# Altium PCB PCB.PcbDoc (part 1 of 2)
Units mm, origin at the board's own origin, x right, y up, seen from the top; angles counter-clockwise.
Board outline 43.18 x 17.78 mm, 4 copper layers (TOP, GND, SIG, BOTTOM), stack 1.586 mm thick; 70 components, 66 nets, 305 pads, 129 vias.
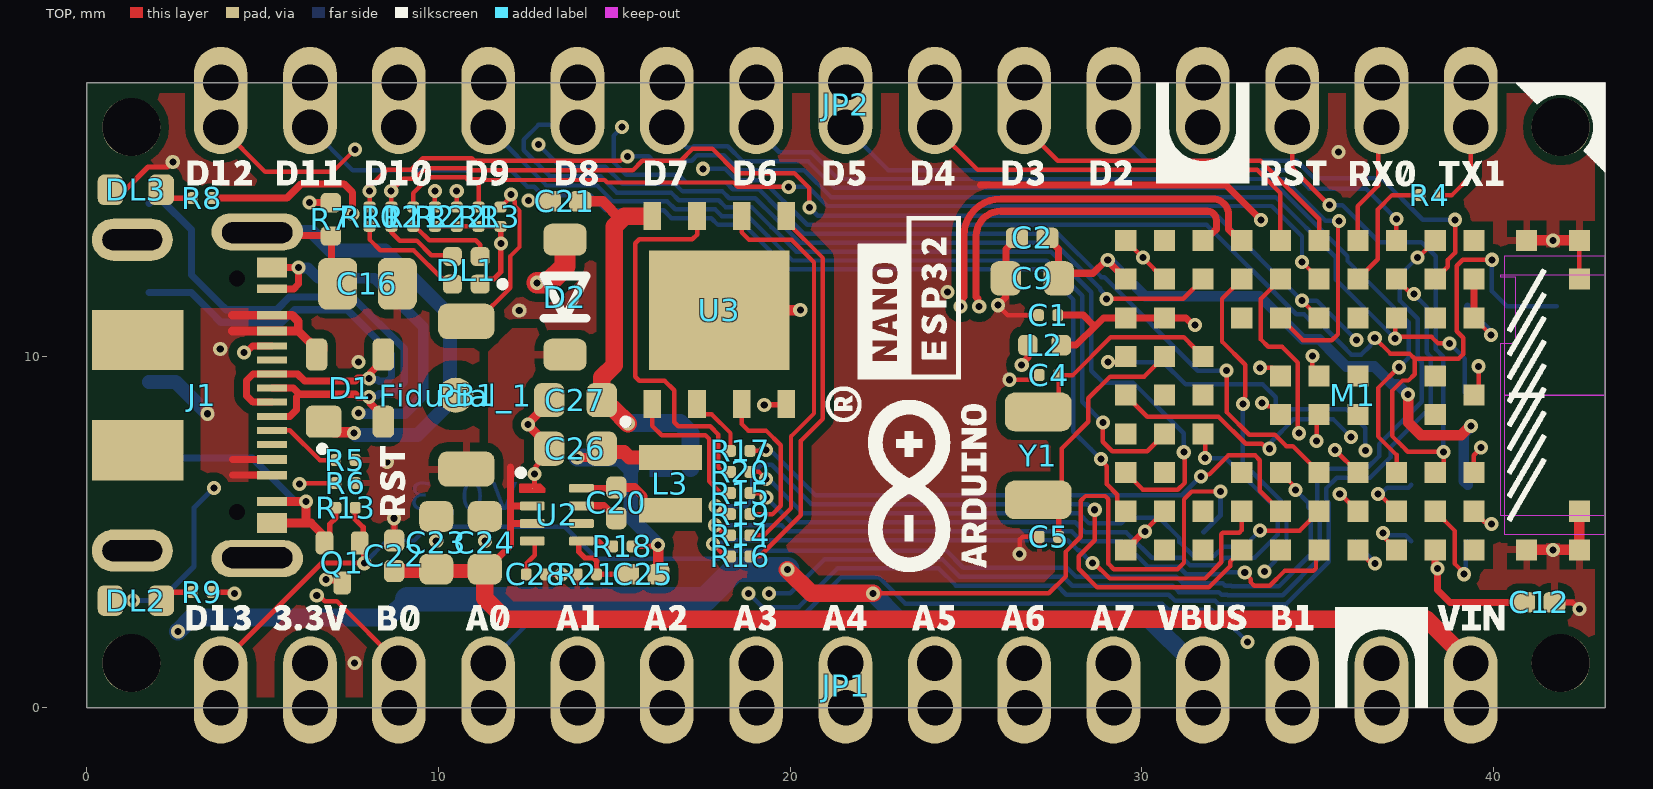
[diagram p0: TOP view]
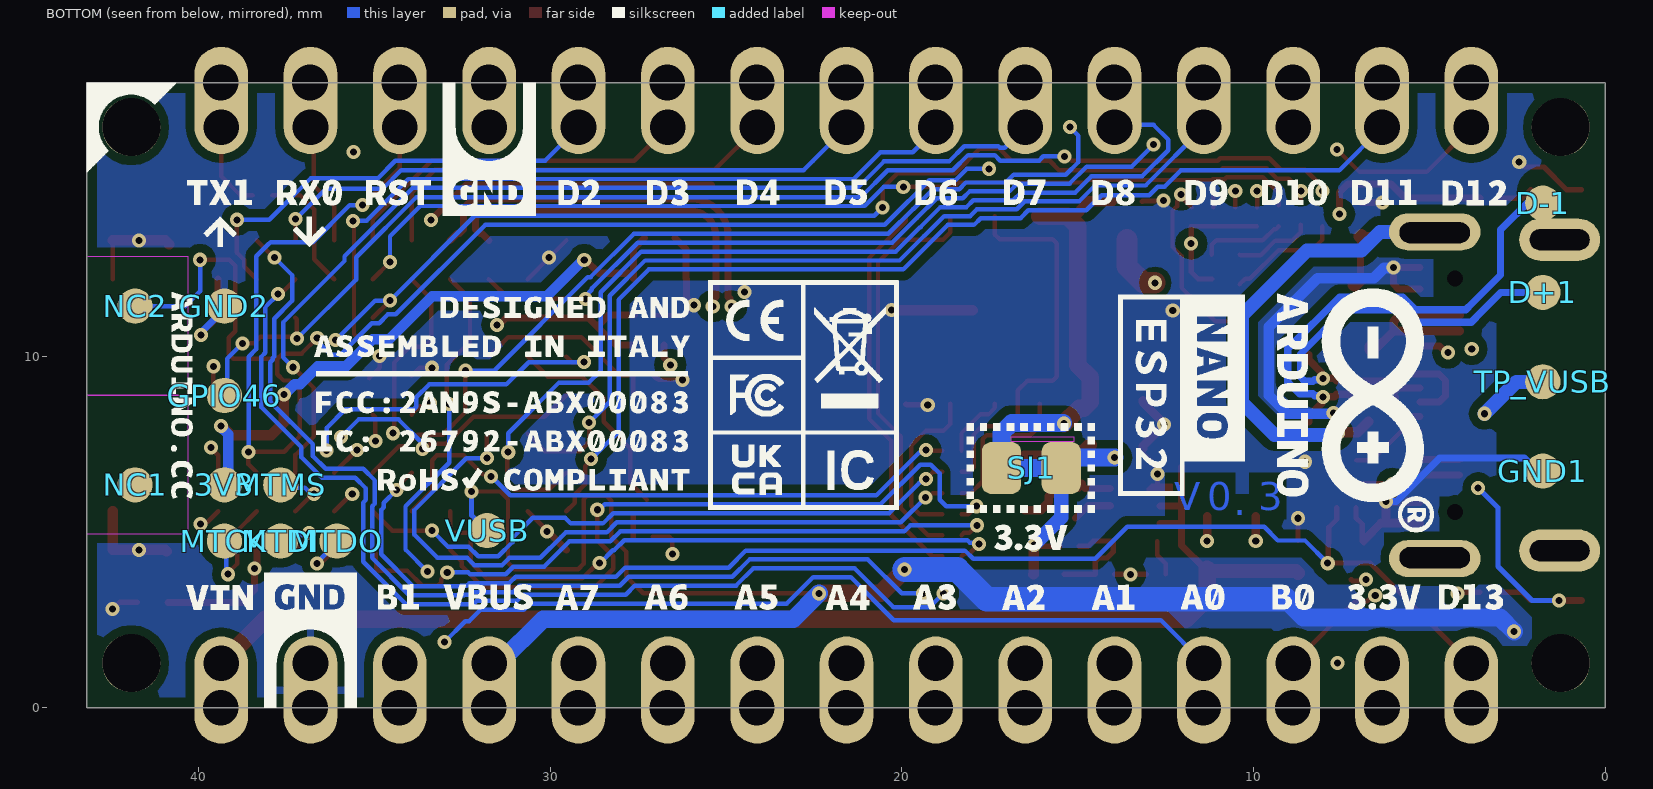
[diagram p1: BOTTOM view, seen from below]
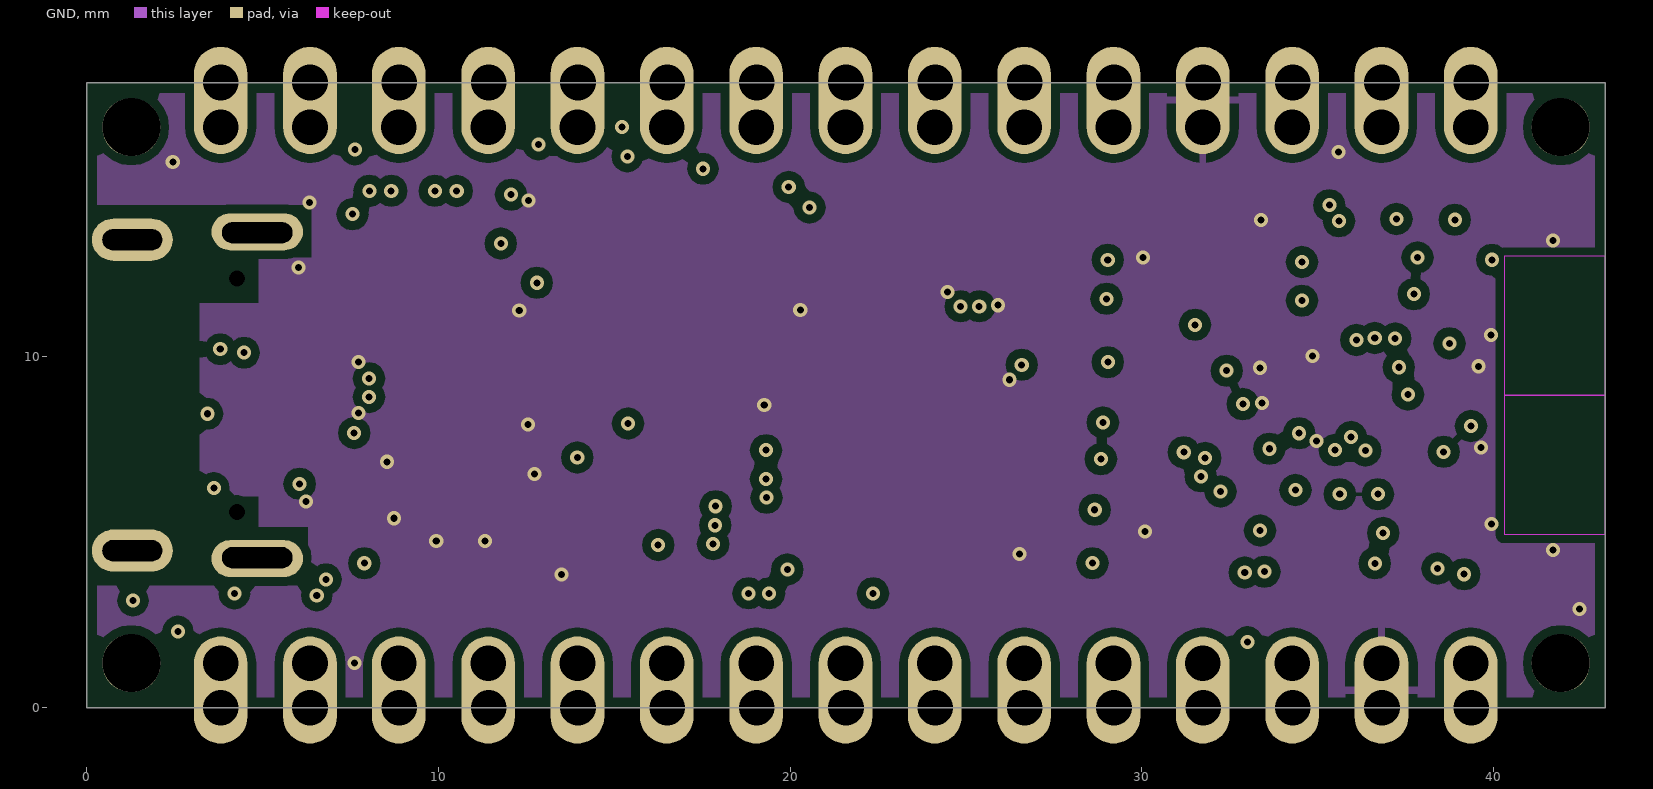
[diagram p2: GND]
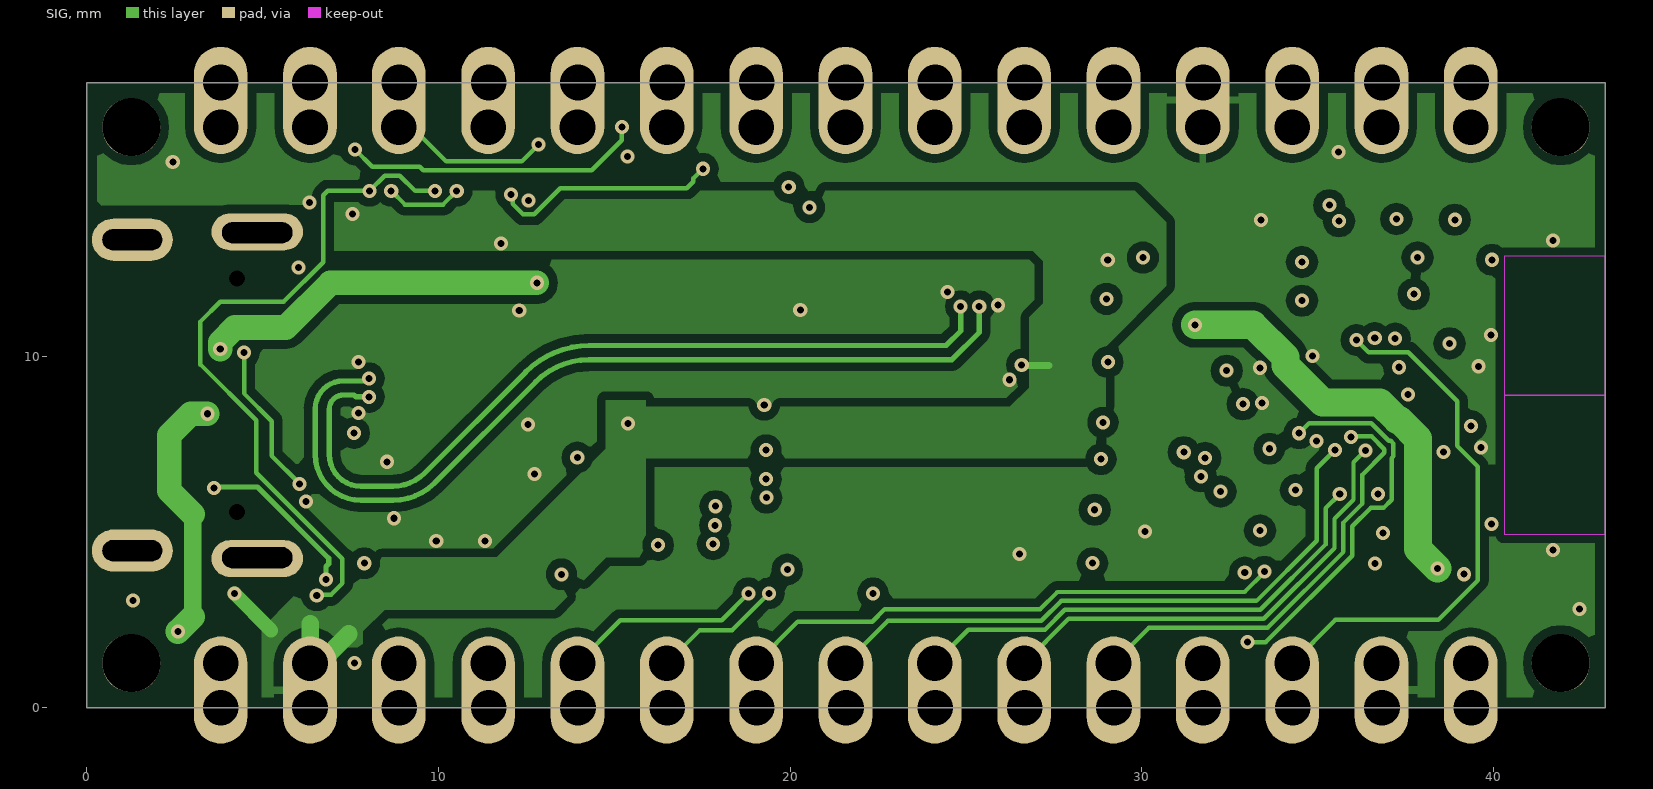
[diagram p3: SIG]
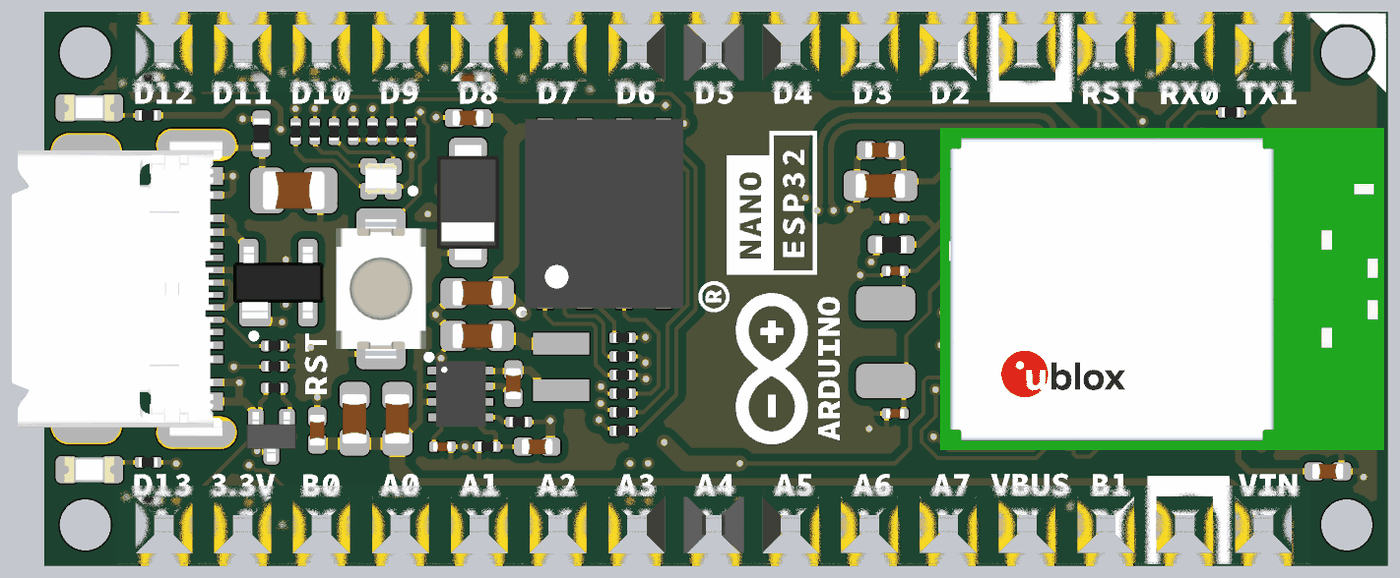
[diagram p5: 3D render of the assembled board from above, using the file's embedded part models]

## Layer stack, top to bottom
Top Solder: solder mask 0.01, Solder Resist, Dk 3.5
TOP: signal copper 0.018
Dielectric 1: prepreg 0.14, PP-014, Dk 4.2
GND: signal copper 0.035
Dielectric2: core 1.2, FR-4, Dk 4.8
SIG: signal copper 0.035
Dielectric3: prepreg 0.14, PP-014, Dk 4.2
BOTTOM: signal copper 0.018
Bottom Solder: solder mask 0.01, Solder Resist, Dk 3.5

## Board outline
0,0 43.18,0 43.18,17.78 0,17.78

## Design rules (kind name [scope] priority, off if disabled: settings)
BoardOutlineClearance BoardOutlineClearance_2 [Component = 'J1'] p1: gap=0.1 ignorepadtopadclearanceinfootprint=FALSE
BoardOutlineClearance BoardOutlineClearance_1 [(ObjectKind = 'Pad') And (Name = 'Free-2') And (PadShape_AllLayers = 'Rounded Rectangle') And (AsMM(PadXSize_AllLayers) = 1.3) And (AsMM(PadYSize_AllLayers) = 1.8)] p2: gap=0.1 ignorepadtopadclearanceinfootprint=FALSE
BoardOutlineClearance HeadersCastellated [((ObjectKind = 'Pad') And (Component = 'JP1')) OR                                                                                    ((ObjectKind = 'Pad') And (Component = 'JP2'))] p3: gap=0 ignorepadtopadclearanceinfootprint=FALSE
BoardOutlineClearance Silks [(OnLayer('Top Overlay') OR OnLayer('Bottom Overlay'))] p4: gap=0 ignorepadtopadclearanceinfootprint=FALSE
BoardOutlineClearance [All] p5: gap=0.3 ignorepadtopadclearanceinfootprint=FALSE
Clearance GND_50R [InNetClass('50R') vs InNet('GND')] p1: gap=0.127 ignorepadtopadclearanceinfootprint=FALSE
Clearance COPPER_0.25mm [All] p2: gap=0.127 ignorepadtopadclearanceinfootprint=FALSE except(0.25: Arc-Fill Arc-Poly Arc-Region Track-Fill Track-Poly Track-Region SMDPad-Fill SMDPad-Poly SMDPad-Region THPad-Fill THPad-Poly THPad-Region Via-Fill Via-Poly Via-Region Fill-Fill Fill-Poly Fill-Region Poly-Poly Poly-Region Region-Region)
Clearance "Generic clearance 0.127mm" [All] p3: gap=0.127 ignorepadtopadclearanceinfootprint=TRUE
ComponentClearance TP2 [((Name = 'MTDI') OR (Name = 'MTDO') OR (Name = 'MTCK') OR (Name = 'MTMS'))] p1: gap=-2 collisioncheckmode=3 verticalgap=0 showdistances=FALSE
ComponentClearance TP [HasFootprint('TP-1.00MM') vs HasFootprint('TP-1.00MM')] p2: gap=0.2 collisioncheckmode=3 verticalgap=-10 showdistances=FALSE
ComponentClearance UFL_ANTENNA [InComponent('ANT1') vs HasFootprint('U.FL-R-SMT-1(60)-1')] p3: gap=-20 collisioncheckmode=3 verticalgap=-20 showdistances=FALSE
ComponentClearance Headers [((Footprint = 'PINHD-1X14_5VF') OR (Footprint = 'PINHD-1X14_5VF') OR (Footprint = 'LEDC1608X80N-AK') OR (Footprint = 'CX90B-16P-Footprint-1') ) vs ((Footprint = 'PINHD-1X14_5VF') OR (Footprint = 'PINHD-1X14_5VF') OR (Footprint = 'LEDC1608X80N-AK') OR (Footprint = 'CX90B-16P-Footprint-1'))] p4: gap=-20 collisioncheckmode=3 verticalgap=-20 showdistances=FALSE
ComponentClearance RFshield [HasFootprint('Shield RF 10mm x 15mm x 3mm-Footprint-1')] p5: gap=-50 collisioncheckmode=3 verticalgap=-20 showdistances=FALSE
ComponentClearance fiducials [InComponent('Fiducial_1') vs InComponent('PB1')] p6: gap=-20 collisioncheckmode=3 verticalgap=-20 showdistances=FALSE
ComponentClearance [All] p7: gap=0.2 collisioncheckmode=3 verticalgap=0 showdistances=TRUE
DiffPairsRouting USB [InDifferentialPairClass('USB')] p1: maxlimit=0.25 minlimit=0.15 mostfreqgap=0.25 toplayer_maxgap=0.15 toplayer_prefgap=0.15 toplayer_minwidth=0.2 toplayer_maxwidth=0.21 toplayer_prefwidth=0.21 midlayer2_mingap=0.25 midlayer2_minwidth=0.15 midlayer2_maxwidth=0.15 midlayer2_prefwidth=0.15 bottomlayer_maxgap=0.15 bottomlayer_prefgap=0.15 bottomlayer_minwidth=0.21 bottomlayer_maxwidth=0.21 bottomlayer_prefwidth=0.21 impedanceprofiledriven=TRUE impedanceprofileid={0EDCC732-50F3-4DDA-8B94-FDD99B063592} impedanceprofilevalue=90.000000 maxuncoupledlength=12.7
Height [All] p1: minheight=0 maxheight=30 prefheight=12.7
HoleSize [All] p1: absolutevalues=TRUE maxlimit=30 minlimit=0.2 maxpercent=80.000 minpercent=20.000
HoleToHoleClearance [All] p1: gap=0.25 allowstackedmicrovias=FALSE
PlaneConnect [All] p1: pad.planeconnectstyle=Relief pad.reliefexpansion=0.508 pad.reliefentries=4 pad.reliefconductorwidth=0.15 pad.reliefairgap=0.254 via.planeconnectstyle=Direct via.reliefexpansion=0.508 via.reliefentries=4 via.reliefconductorwidth=0.254 via.reliefairgap=0.254
PolygonConnect 0201 [HasFootprint('RES-0201') OR HasFootprint('CAP-0201')] p1: connectstyle=Relief reliefconductorwidth=0.15 reliefentries=4 polygonreliefangle="90 Angle" airgapwidth=0.254
PolygonConnect [All] p2: thpad.connectstyle=Relief thpad.reliefconductorwidth=0.2 thpad.reliefentries=4 thpad.polygonreliefangle="90 Angle" thpad.airgapwidth=0.254 smdpad.connectstyle=Relief smdpad.reliefconductorwidth=0.2 smdpad.reliefentries=4 smdpad.polygonreliefangle="90 Angle" smdpad.airgapwidth=0.254 via.connectstyle=Direct via.reliefconductorwidth=0.254 via.reliefentries=4 via.polygonreliefangle="90 Angle" via.airgapwidth=0.254
RoomDefinition TOP [InComponentClass('TOP')] p1: confinementstyle=ConfineIn formatcopy=TRUE lockcomponents=FALSE outline 44.6,2.6 48.6,2.6 48.6,5.6 44.6,5.6
RoutingVias StandardVias [All] p1: holewidth=0.2 width=0.4 viastyle="Through Hole" minholewidth=0.2 minwidth=0.4 maxholewidth=0.2 maxwidth=0.4
ShortCircuit [Component = 'SJ1' vs (InNet('+3V3') OR InNet('NetC25_2'))] p1: allowed=TRUE
SilkToSilkClearance [All] p1: silktosilkclearance=0.2
SilkToSolderMaskClearance [IsPad] p1: minsilkscreentomaskgap=0.15 clearancetoexposedcopper=TRUE
SolderMaskExpansion VIAtented [IsVia] p1: expansion=0.102 istentingtop=TRUE
SolderMaskExpansion [All] p2: expansion=0.05 istentingtop=FALSE
UnConnectedPin [All] p1:
UnRoutedNet [All] p1: checkbadconnections=TRUE
ViasUnderSMD Flash [(ObjectKind = 'Pad') And (Name = 'U2-9')] p1: allowed=TRUE
ViasUnderSMD uC [(ObjectKind = 'Pad') And (Name = 'U4-49')] p2: allowed=TRUE
ViasUnderSMD [All] p3: allowed=FALSE
Width 50R [InNetClass('50R')] p1: maxlimit=0.254 minlimit=0.2 preferedwidth=0.254 toplayer_maxwidth=0.215 toplayer_prefwidth=0.215 impedanceprofiledriven=TRUE impedanceprofileid={0726661E-E8FD-48BE-B853-6BE56F4BAC3B} impedanceprofilevalue=50.000000 minimp=50.000000 maximp=50.000000 favimp=50.000000
Width StandardTraces [All] p2: maxlimit=5 minlimit=0.127 preferedwidth=0.15
20 further rules are at their usual default settings.

## Classes and differential pairs
net class DIGITAL: GPIO5_1 GPIO6_1 GPIO7_1 GPIO8_1 GPIO9_1 GPIO10_1 GPIO17_1 GPIO18_1 GPIO21_1 GPIO38_1 GPIO47_1 GPIO48_1
net class ANALOG: GPIO1_1 GPIO2_1 GPIO3_1 GPIO4_1 GPIO11_1 GPIO12_1 GPIO13_1 GPIO14_1
net class FLASH: GPIO27_1 GPIO28_1 GPIO29_1 GPIO30_1 GPIO31_1 GPIO32_1
differential pair class USB: USB_D_1
differential pair USB_D_1: +USB_D_1_P -USB_D_1_N

## Components (designator, comment, footprint, x,y, rotation, side; value= is the part's Value field where it differs from the comment)
3V3 "CMP-018-0005-A.3" TP-1.00MM#1 39.263,6.341 r270 bottom
C1 "GRM033R60J105MEA2D" CAP-0201 27.335,11.164 r0 top value=1µF
C2 "GRM155R61H104KE19D" CAP-0402 26.885,13.364 r0 top value=100nF
C4 "GRM0335C1E120JA01J" CAP-0201 27.36,9.464 r180 top value=12pF
C5 "GRM0335C1E120JA01J" CAP-0201 27.36,4.864 r180 top value=12pF
C9 "GRM188R61E106MA73J" CAP-0603 26.885,12.214 r0 top value=10µF
C12 "GRM155R61H104KE19D" CAP-0402 41.3,3 r180 top value=100nF
C16 "C0805C472KDRACTU" CAP-0805 7.983,12.06 r180 top value=4.7nF
C20 "GRM155R61H104KE19D" CAP-0402 15.059,5.828 r270 top value=100nF
C21 "GRM155R61H104KE19D" CAP-0402 13.6,14.4 r0 top value=100nF
C22 "GRM155R61H104KE19D" CAP-0402 8.741,4.323 r90 top value=100nF
C23 "GRM188R61E106MA73J" CAP-0603 9.94,4.692 r270 top value=10µF
C24 "GRM188R61E106MA73J" CAP-0603 11.32,4.692 r270 top value=10µF
C25 "C0402C220J5GAC7411" CAP-0402 15.825,3.797 r0 top value=22pF
C26 "GRM188R61E106MA73J" CAP-0603 13.898,7.368 r0 top value=10µF
C27 "GRM188R61E106MA73J" CAP-0603 13.898,8.748 r0 top value=10µF
C28 "GRM033R60J105MEA2D" CAP-0201 12.775,3.797 r180 top value=1µF
D1 "PRTR5V0U2X,215" SOT190P230X110-4N 7.488,9.09 r0 top
D2 "PMEG6020AELRX" SOD123-1 13.6,11.675 r90 top
D+1 "CMP-018-0005-A.3" TP-1.00MM#2 1.778,11.811 r180 bottom
D-1 "CMP-018-0005-A.3" TP-1.00MM#2 1.778,14.351 r180 bottom
DL1 "SMLP34RGB2W3" SMLP34RGB2W 10.794,12.44 r90 top
DL2 "KPT-1608YC" LEDC1608X80N-AK#1 1.4,3.05 r0 top
DL3 "HSMG-C190" LEDC1608X80N-AK#2 1.4,14.73 r0 top
Fiducial_1 "Fiducial mark 1mm with 2mm solder" "Fiducial mark 1mm with circle-Footprint-1" 10.494,8.89 r90 top
GND1 "CMP-018-0005-A.3" TP-1.00MM#2 1.778,6.731 r90 bottom
GND2 "CMP-018-0005-A.3" TP-1.00MM#1 39.263,11.421 r270 bottom
GPIO46 "CMP-018-0005-A.3" TP-1.00MM#1 39.263,8.881 r90 bottom
J1 "CX90B-16P" CX90B-16P-Footprint-1 3.288,8.89 r270 top locked
JP1 "PINHD-1X15-NANO-ANALOG-CASTELLATED" PINHD-1X14_5VF#1 3.81,1.27 r180 top locked
JP2 "PINHD-1X15-NANO-DIGITAL-CASTELLATED" PINHD-1X14_5VF#2 39.37,16.51 r0 top locked
L2 "BSCH001005052N0SCP" L-0402 27.235,10.314 r0 top
L3 "MAKK2016T3R3M" MAKK2016T3R3M-Footprint-1 16.598,6.368 r90 top value=3.3µH
M1 "NORA-W106-10B" NORA-W106-Footprint-1 35.043,8.89 r270 top locked
MTCK "CMP-018-0005-A.3" TP-1.00MM#2 39.263,4.741 r0 bottom
MTDI "CMP-018-0005-A.3" TP-1.00MM#2 37.663,4.741 r0 bottom
MTDO "CMP-018-0005-A.3" TP-1.00MM#2 36.063,4.741 r0 bottom
MTMS "CMP-018-0005-A.3" TP-1.00MM#2 37.663,6.341 r0 bottom
NC1 "CMP-018-0005-A.3" TP-1.00MM#1 41.803,6.341 r270 bottom
NC2 "CMP-018-0005-A.3" TP-1.00MM#1 41.803,11.421 r270 bottom
PB1 "IT-1185AP1C-160G-GTR" C&K_PTS820_NO_HOLES-1 10.794,8.89 r90 top locked
Q1 "2N7002T-7-F" SOT523 7.262,4.12 r180 top
R1 "RMCF0201FT976K" RES-0201 11.144,13.965 r270 top value=976k
R2 "RMCF0201FT976K" RES-0201 9.904,13.965 r270 top value=976k
R3 "RC0201FR-075K1L" RES-0201 11.764,13.965 r270 top value=5.1k
R4 "CRCW0201499RFKED" RES-0201 38.181,14.58 r180 top value=499
R5 "RC0201FR-075K1L" RES-0201 7.358,7.045 r180 top value=5.1k
R6 "RC0201FR-075K1L" RES-0201 7.362,6.39 r180 top value=5.1k
R7 "CRCW04021M00FKED" RES-0402 6.943,13.89 r270 top value=1M
R8 "CRCW0201499RFKED" RES-0201 3.29,14.49 r0 top value=499
R9 "CRCW0201499RFKED" RES-0201 3.291,3.29 r0 top value=499
R10 "CRCW0201499RFKED" RES-0201 8.044,13.965 r270 top value=499
R11 "CRCW0201499RFKED" RES-0201 9.284,13.965 r270 top value=499
R12 "CRCW0201499RFKED" RES-0201 8.664,13.965 r270 top value=499
R13 "RMCF0201FT976K" RES-0201 7.362,5.69 r0 top value=976k
R14 "CRCW02010000Z0ED" RES-0201 18.582,4.907 r0 top value=0
R15 "CRCW02010000Z0ED" RES-0201 18.582,6.107 r180 top value=0
R16 "CRCW02010000Z0ED" RES-0201 18.582,4.307 r0 top value=0
R17 "CRCW02010000Z0ED" RES-0201 18.582,7.307 r180 top value=0
R18 "RMCF0201FT976K" RES-0201 15.234,4.593 r0 top value=976k
R19 "CRCW02010000Z0ED" RES-0201 18.582,5.507 r0 top value=0
R20 "CRCW02010000Z0ED" RES-0201 18.582,6.707 r180 top value=0
R21 "AC0201FR-07220KL" RES-0201 14.225,3.797 r0 top value=220k
R22 "RMCF0201FT976K" RES-0201 10.524,13.965 r270 top value=976k
SJ1 "SMD solder JUMPER CLOSED" SJ 16.32,6.82 r0 bottom
TP_VUSB "CMP-018-0005-A.3" TP-1.00MM#3 0.41,10.431 r90 bottom
U2 "MP2322GQH" QFN50P150X200X90-8L 13.368,5.493 r0 top
U3 "GD25B128EWIGR" PSON127P600X60_HS-9N 17.989,11.31 r90 top
VUSB "CMP-018-0005-A.3" TP-1.00MM#1 31.795,5.041 r90 bottom
Y1 "CM315D32768DZFT" ABS07 27.055,7.164 r90 top

## Footprints (in the part's own frame and the unit in brackets; to place one, negate y for a bottom-side part, rotate by r counter-clockwise, add the part's x,y. Pads: shape width x height; smd on the part's side, far side on the other; paste and mask are expansions set on the pad)
ABS07 [mm]
  rrect50% 1.1x1.9 smd: 1(-1.25,0) 2(1.25,0)
  body extent -1.65,-0.83 1.65,0.83, height 0.9
C&K_PTS820_NO_HOLES-1 [mm]
  rrect49% 1x1.6 smd mask+0.05: 1(-2.1,0) 2(2.1,0)
  body extent -2.25,-1.45 2.25,1.45, height 2
CAP-0201 [mm] "Chip Capacitor, 2-Leads, Body 0201 (in) 0603 (mm) IPC Medium Density"
  rrect52% 0.31x0.34 smd mask+0.05: 1(-0.275,0) 2(0.275,0)
  body extent -0.3,-0.15 0.3,0.15, height 0.3
CAP-0402 [mm] "Chip Capacitor, 2-Leads, Body  0402 (in) 1005 (mm), IPC Medium Density"
  rrect52% 0.63x0.58 smd mask+0.05: 1(-0.435,0) 2(0.435,0)
  body extent -0.5,-0.25 0.5,0.25, height 0.5
CAP-0603 [mm] "Chip Capacitor, Body 0603 imperial,1.6x0.8mm, IPC High Density"
  rrect51% 0.87x0.97 smd mask+0.05: 1(-0.75,0) 2(0.75,0)
  body extent -0.8,-0.4 0.8,0.4, height 0.8
CAP-0805 [mm] "Chip Capacitor, Body 0805 imperial, 2.0x1.2mm, IPC Medium Density"
  rrect45% 1.11x1.47 smd mask+0.05: 1(-0.85,0) 2(0.85,0)
  body extent -1,-0.62 1,0.63, height 1.25
CX90B-16P-Footprint-1 [mm]
  rect 0.57x0.85 smd mask+0.05: A1(-3.635,1.988) A12(3.635,1.988)
  rect 0.25x0.85 smd mask+0.05: A4(-2.275,1.988) A9(2.275,1.988) B1(3.025,1.988) B4(1.825,1.988) B9(-1.825,1.988) B12(-3.025,1.988)
  rect 0.2x0.85 smd mask+0.05: A5(-1.4,1.988) A6(-0.6,1.988) A7(0.6,1.988) A8(1.4,1.988) B5(1,1.988) B6(0.2,1.988) B7(-0.2,1.988) B8(-1,1.988)
  round 0.2 hole 0.45 unplated paste-50 mask+0.2: FIXING(-3.32,0.988) FIXING(3.32,0.988)
  rect 1.71x2.6 smd paste-0.3 mask+0.05: FIXING(-1.565,-1.837) FIXING(1.565,-1.837)
  oval 1.05x2.6 hole 0.6 slot 2 at 90 deg copper offset -0.025,0 mask+0.05: SHIELD1(-4.62,1.563)
  oval 1.05x2.6 hole 0.6 slot 2 at 90 deg copper offset 0.025,0 mask+0.05: SHIELD2(4.62,1.563)
  oval 1.2x2.3 hole 0.6 slot 1.7 at 90 deg mask+0.05: SHIELD3(-4.42,-1.987) SHIELD4(4.42,-1.987)
  body extent -4.77,-4.4 4.77,2.4, height 3.17
"Fiducial mark 1mm with circle-Footprint-1" [mm]
  round 1 smd paste-10 mask+0.05: 1(0,0)
  TOP pour cut-out: 0,1 0.383,0.924 0.707,0.707 0.924,0.383 1,0 1,0 0.924,-0.383 0.707,-0.707 0.383,-0.924 0,-1 0,-1 -0.383,-0.924 -0.707,-0.707 -0.924,-0.383 -1,0 -1,0 -0.924,0.383 -0.707,0.707 -0.383,0.924 0,1
L-0402 [mm] "Chip Inductor, 2-Leads, Body 0402 (in)"
  rrect51% 0.55x0.58 smd mask+0.05: 1(-0.475,0) 2(0.475,0)
  body extent -0.5,-0.25 0.5,0.25, height 0.34
LEDC1608X80N-AK#1 [mm]
  rrect50% 0.72x0.87 smd: A(0.725,0) C(-0.725,0)
  body extent -0.8,-0.4 0.8,0.4, height 0.79
LEDC1608X80N-AK#2 [mm]
  rrect50% 0.72x0.87 smd mask+0.05: A(0.725,0) C(-0.725,0)
  body extent -0.8,-0.4 0.8,0.4, height 0.79
MAKK2016T3R3M-Footprint-1 [mm]
  rect 0.7x1.8 smd mask+0.05: 1(-0.75,0) 2(0.75,0)
  body extent -1,-0.8 1,0.8, height 1
NORA-W106-Footprint-1 [mm] "Default PCB Component"
  rect 0.6x0.6 smd mask+0.05: A1(4.4,-5.5) A2(3.3,-5.5) A3(2.2,-5.5) A4(1.1,-5.5) A5(0,-5.5) A6(-1.1,-5.5) A7(-2.2,-5.5) A8(-3.3,-5.5) A9(-4.4,-5.5) B1(4.4,-4.4) B2(3.3,-4.4) B3(2.2,-4.4) B4(1.1,-4.4) B5(0,-4.4) B6(-1.1,-4.4) B7(-2.2,-4.4) B8(-3.3,-4.4) B9(-4.4,-4.4) C1(4.4,-3.3) C2(3.3,-3.3) C4(1.1,-3.3) C5(0,-3.3) C6(-1.1,-3.3) C8(-3.3,-3.3) C9(-4.4,-3.3) D1(4.4,-2.2) D2(3.3,-2.2) D3(2.2,-2.2) D7(-2.2,-2.2) D8(-3.3,-2.2) D9(-4.4,-2.2) E1(4.4,-1.1) E2(3.3,-1.1) E3(2.2,-1.1) E4(0.55,-1.1) E5(-0.55,-1.1) E7(-2.2,-1.1) E8(-3.3,-1.1) E9(-4.4,-1.1) F1(4.4,0) F2(3.3,0) F3(2.2,0) F4(0.55,0) F5(-0.55,0) F7(-2.2,0) F8(-3.3,0) F9(-4.4,0) G1(4.4,1.1) G2(3.3,1.1) G3(2.2,1.1) G4(0.55,1.1) G5(-0.55,1.1) G7(-2.2,1.1) G8(-3.3,1.1) G9(-4.4,1.1) H1(4.4,2.2) H2(3.3,2.2) H3(2.2,2.2) H7(-2.2,2.2) H8(-3.3,2.2) H9(-4.4,2.2) J1(4.4,3.3) J2(3.3,3.3) J3(2.2,3.3) J4(0.55,3.3) J5(-0.55,3.3) J7(-2.2,3.3) J8(-3.3,3.3) J9(-4.4,3.3) K1(4.4,4.4) K2(3.3,4.4) K3(2.2,4.4) K5(0,4.4) K7(-2.2,4.4) K8(-3.3,4.4) K9(-4.4,4.4) L1(4.4,5.9) L9(-4.4,5.9) M1(4.4,7.4) M2(3.3,7.4) M8(-3.3,7.4) M9(-4.4,7.4)
  body extent -5.19,-6.22 5.21,8.08, height 1.96
PINHD-1X14_5VF#1 [mil]
  oval 60x120 hole 40 copper offset 0,30 paste-100: 1(0,0) 2(-100,0) 3(-199.41,0) 4(-299.41,0) 5(-399.41,0) 6(-499.41,0) 7(-599.41,0) 8(-699.41,0) 9(-799.41,0) 10(-899.41,0) 11(-999.41,0) 12(-1099.41,0) 13(-1199.41,0) 14(-1299.41,0) 15(-1399.41,0)
  round 27.56 hole 40 mask+7.87: 1(0,50) 2(-100,50) 3(-200,50) 4(-300,50) 5(-400,50) 6(-500,50) 7(-600,50) 8(-700,50) 9(-800,50) 10(-900,50) 11(-1000,50) 12(-1100,50) 13(-1200,50) 14(-1300,50) 15(-1400,50)
  body extent -1454,-50 60,50, height 335
PINHD-1X14_5VF#2 [mil]
  oval 60x120 hole 40 copper offset 0,30 paste-100: 1(-0.59,0) 2(-100.59,0) 3(-200.59,0) 4(-300.59,0) 5(-400.59,0) 6(-500.59,0) 7(-600.59,0) 8(-700.59,0) 9(-800.59,0) 10(-900.59,0) 11(-1000.59,0) 12(-1100.59,0) 13(-1200.59,0) 14(-1300,0) 15(-1400,0)
  round 27.56 hole 40 mask+7.87: 1(0,50) 2(-100,50) 3(-200,50) 4(-300,50) 5(-400,50) 6(-500,50) 7(-600,50) 8(-700,50) 9(-800,50) 10(-900,50) 11(-1000,50) 12(-1100,50) 13(-1200,50) 14(-1300,50) 15(-1400,50)
  body extent -1460,-50 54,50, height 335
PSON127P600X60_HS-9N [mm] "PSON, 8-Leads, Body 5,00x6,00mm, Pitch 1,27mm, Thermal Pad 4,00x3,40mm, IPC Medium Density"
  rect 0.8x0.5 smd mask+0.05: 1(-2.67,1.905) 2(-2.67,0.635) 3(-2.67,-0.635) 4(-2.67,-1.905) 5(2.67,-1.905) 6(2.67,-0.635) 7(2.67,0.635) 8(2.67,1.905)
  rect 3.4x4 smd paste-10 mask+0.05: 9(0,0)
  silkscreen extent -3.22,2.62 -3.13,2.72, body extent -3.05,-2.55 3.05,2.55, height 0.6
QFN50P150X200X90-8L [mm] "QFN, 8-Leads, Body 1,50x2,00mm, Pitch 0,50mm, IPC High Density"
  round 0.025 smd mask+0.05: 1(-0.7,0.75)
  rrect25% 0.7x0.25 smd mask+0.05: 2(-0.7,0.25) 3(-0.7,-0.25) 4(-0.7,-0.75) 5(0.7,-0.75) 6(0.7,-0.25) 7(0.7,0.25) 8(0.7,0.75)
  TOP region: -1.044,0.625 -1.056,0.627 -1.066,0.634 -1.073,0.644 -1.075,0.656 -1.075,0.656 -1.075,0.844 -1.073,0.856 -1.066,0.866 -1.056,0.873 -1.044,0.875 -1.044,0.875 -0.452,0.875 -0.325,0.748 -0.325,0.656 -0.327,0.644 -0.334,0.634 -0.344,0.627 -0.356,0.625 -0.356,0.625
  silkscreen extent -1.07,1.14 -0.97,1.24, body extent -0.8,-1.05 0.8,1.05, height 0.9
RES-0201 [mm] "Chip Resistor, 2-Leads, Body 0201 (in) 0603 (mm) IPC Medium Density"
  rrect52% 0.31x0.34 smd mask+0.05: 1(-0.275,0) 2(0.275,0)
  body extent -0.3,-0.15 0.3,0.15, height 0.24
RES-0402 [mm] "Chip Resistor, 2-Leads, Body  0402 (in) 1005 (mm), IPC Medium Density"
  rrect51% 0.55x0.58 smd mask+0.05: 1(-0.475,0) 2(0.475,0)
  body extent -0.5,-0.25 0.5,0.25, height 0.34
SJ [mm]
  rrect45% 1.11x1.47 smd mask+0: 1(-0.85,0) 2(0.85,0)
  TOP region: -0.31,0.254 -0.31,-0.254 0.31,-0.254 0.31,0.254
SMLP34RGB2W [mm]
  rrect52% 0.54x0.54 smd mask+0.05: 1(-0.395,-0.395) 2(-0.395,0.395) 3(0.395,0.395) 4(0.395,-0.395)
  silkscreen extent -0.44,-1.08 -0.34,-0.98, body extent -0.5,-0.5 0.5,0.5, height 0.2
SOD123-1 [mm]
  rrect50% 0.91x1.22 smd: A(1.635,0) C(-1.635,0)
  silkscreen extent -0.6,-0.6 0.6,0.6, body extent -1.85,-1 1.85,1, height 1.2
SOT190P230X110-4N [mm]
  rrect33% 1.01x0.91 smd paste+0 mask+0.05: 1(-0.75,-0.955)
  rrect49% 0.61x0.91 smd paste+0 mask+0.05: 2(0.95,-0.955) 3(0.95,0.955) 4(-0.95,0.955)
  silkscreen extent -0.84,-1.78 -0.74,-1.68, body extent -1.45,-1.15 1.45,1.15, height 1
SOT523 [mm]
  rrect50% 0.5x0.66 smd mask+0.05: D(0,0.57) G(-0.5,-0.57) S(0.5,-0.57)
  body extent -0.8,-0.8 0.8,0.8, height 0.8
TP-1.00MM#1 [mm]
  rrect100% 1x1 smd paste-2.54: X(0,0)
TP-1.00MM#2 [mm]
  rrect100% 1x1 smd paste-2.54 mask+0.05: X(0,0)
TP-1.00MM#3 [mm]
  rrect100% 1x1 smd paste-2.54 mask+0.05: X(-1.16,1.368)

## Part data
3V3 D+1 D-1 GND1 GND2 GPIO46 MTCK MTDI MTDO MTMS NC1 NC2 TP_VUSB VUSB: library part UT0013-A.4, "Test point 1.00mm", Design Item ID=CMP-018-0005-A.3, Pin Count=1, Source=ut.SchLib
C1 C28: library part C0002-A.12, "CAP CHIP 0201 1uF 6.3V X5R 20%", Case Code (Imperial)=0201, Case Code (Metric)=0603, Dielectric=X5R, Manufacturer=Murata, Tolerance=20%, Voltage=6.3V, Case/Package=0201, Code Arduino=A5520, Package=0201, Part Number=GRM033R60J105MEA2D
C2 C12 C20 C21 C22: library part C0015-A.11, "CAP CHIP 0402 100nF 50V X5R 10%", Case Code (Imperial)=0402, Case Code (Metric)=1005, Dielectric=X5R, Manufacturer=Murata, Tolerance=10%, Voltage=50V, Case/Package=0402, Code Arduino=A5141, Package=0402, Part Number=GRM155R61H104KE19D
C4 C5: library part C0003-A.12, "CAP CHIP 0201 12pF 25V C0G 5%", Case Code (Imperial)=0201, Case Code (Metric)=0603, Dielectric=C0G, Manufacturer=Murata, Tolerance=5%, Voltage=25V, Case/Package=0201, Code Arduino=C0003, Package=0201, Part Number=GRM0335C1E120JA01J
C9 C23 C24 C26 C27: library part C0047-A.15, "CAP CHIP 0603 10uF 25V X5R 20%", Case Code (Imperial)=0603, Case Code (Metric)=1608, Dielectric=X5R, Manufacturer=Murata, Tolerance=20%, Voltage=25V, Case/Package=0603, Code Arduino=2213, Package=0603, Part Number=GRM188R61E106MA73J
C16: library part C0059-A.11, "CAP CHIP 0805 4.7nF 1000V X7R 10%", Case Code (Imperial)=0805, Case Code (Metric)=2012, Dielectric=X7R, Manufacturer=KEMET, Tolerance=10%, Voltage=1kV, Case/Package=0805, Code Arduino=0689, Package=0805, Part Number=C0805C472KDRACTU
C25: library part C0029-A.11, "CAP CHIP 0402 22pF 50V C0G 5%", Case Code (Imperial)=0402, Case Code (Metric)=1005, Dielectric=C0G, Manufacturer=KEMET, Manufacturer 2=AVX, Manufacturer Part Number 2=04025A220JAT2A, Tolerance=5%, Voltage=50V, Case/Package=0402, Code Arduino=0137, Package=0402, Part Number=C0402C220J5GAC7411
D1: library part D0025-A.5, "TVS ARRAY 4LIN.8kV 1pF SOT143B", Manufacturer=Nexperia, Code Arduino=2209, Device Type="ESD protection", Part Number=PRTR5V0U2X,215
D2: library part D0026-A.6, "DIODE SCHOTTKY SMD 2A 60V SOD123FL", Forward Current=2A, Forward Voltage=0.6V, Manucturer Part Number 2=SS26L, Manufacturer=Nexperia, Code Arduino=2208, Device Type="Diode Schottky", Manucturer 2=Hottech, Part Number=PMEG6020AELRX, RoHS Compliance=RoHS3
DL1: library part L0014-A.10, "LED RGB DIFFUSED PICOLED SMD", Case Code (Imperial)=0404, Case Code (Metric)=1010, Color=Blue,Green,Red, Forward Current=20mA, Forward Voltage=3V, Lens Color=White, Manufacturer="ROHM Semiconductor", Max Operating Temperature=85°C, Min Operating Temperature=-40°C, Package Quantity=1, Test Current=5mA, Case/Package=0404, Code Arduino=A5469, Dominant Wavelength=470nm, Height=0.25mm, Lead Free="Lead Free", Length=1mm, Lens Style=Rectangular, Lens Transparency=Diffused, Luminous Intensity=45mcd, Mount="Surface Mount", Number of Pins=4, Packaging="Tape and Reel", Part Number=SMLP34RGB2W3, Pin Count=4, REACH SVHC=Unknown, Width=1mm
DL2: library part L0008-A.4, "LED SMD 0603 GIA588   8mcd 120^", Manufacturer=Kingbright, Code Arduino=2243, Part Number=KPT-1608YC, Pin Count=2
DL3: library part L0009-A.4, "LED SMD 0603 GREEN/568 15mcd 120^", Manufacturer=Broadcom, Code Arduino=2204, Part Number=HSMG-C190, Pin Count=2
Fiducial_1: library part UT0024-A.6
J1: library part J0272-A.3, "CONN RCPT USB3.1 TYPEC 16POS SMD", Manufacturer=Hirose, Code Arduino=J0272, Part Number=CX90B-16P
JP1: library part J0158-A.2, "CONN THD SOCKET F/1/D 15V JANALOG NANO-TYPE CASTELLATED", Code Arduino=A5563, Pin Count=15
JP2: library part J0183-A.1, "CONN THD SOCKET F/1/D 15V JDIGITAL NANO-TYPE CASTELLATED", Code Arduino=A5564, Pin Count=15
L2: library part I0069-A.3, "IND CHIP 0402 2nH +-0.3nH 400mA", Case Code (Imperial)=0402, Current=400mA, DC Resistance (DCR)=100m, Frequency=8.1GHz, Inductance=2nH, Manufacturer="Pulse Electronics", Series Resistance=100mR, Test Frequency=100MHz, Code Arduino=I0069, Packaging=0402, Part Number=BSCH001005052N0SCP
L3: library part I0045-A.9, "IND CHIP 0806 3.3 uH 20% 1.2A", Case Code (Imperial)=0806, Case Code (Metric)=2016, Current Rating=1.2A, DC Resistance (DCR)=255mR, Inductance=3.3µH, Manufacturer="Taiyo Yuden", Manufacturer 2=Murata, Manufacturer Part Number 2=LQM2MPN3R3NG0L, Max DC Current=1.15A, Max Operating Temperature=105°C, Min Operating Temperature=-40°C, Package Quantity=3000, Resistor Type=Wirewound, Test Frequency=2MHz, Tolerance=20%, Case/Package=0806, Code Arduino=I0045, Core Material=Metal, Device Type=Inductor, Halogen Free="Halogen Free", Height=1mm, Height - Seated (Max)=0.039inch, Length=0.079inch, Mount="Surface Mount", Packaging="Tape and Reel", Part Number=MAKK2016T3R3M, Saturation Current=1.15A, Shielding=Shielded, Termination=SMD/SMT, Width=1.6mm
M1: library part M0028-A.9, "MODULE WIFI +BLE5 ESP32-S3", Manufacturer=U-Blox, Code Arduino=M0028, Part Number=NORA-W106-10B
PB1: library part B0001-A.7, "PUSHBUTTON WHITE NO ANCHORS", Color=White, Manufacturer=Switronic, Code Arduino=0173, Mount=SMT, Part Number=IT-1185AP1C-160G-GTR
Q1: library part T0003-A.2, "MOSFET N-CH 60V 115mA SOT523", Manufacturer="Diodes Inc.", Code Arduino=2368, Device Type="Mosfet N-CH SMD", Part Number=2N7002T-7-F, Pin Count=3
R1 R2 R13 R18 R22: library part R0198-A.11, "RES CHIP 0201 976k 1/20W 1%", Case Code (Imperial)=0201, Case Code (Metric)=0603, Manufacturer="Stackpole Electronics Inc", Power=50mW, Tolerance=1%, Case/Package=0201, Code Arduino=R0198, Part Number=RMCF0201FT976K
R3 R5 R6: library part R0169-A.15, "RES CHIP 0201 5.1k OHM 1/20W 1%", Case Code (Imperial)=0201, Case Code (Metric)=0603, Manufacturer=Yageo, Max Operating Temperature=125°C, Max Power Dissipation=50mW, Min Operating Temperature=-55°C, Resistance=5.1kR, Temperature Coefficient=200ppm/°C, Tolerance=1%, Voltage Rating=25V, Case/Package=0201, Code Arduino=R0169, Composition="Thick Film", Depth=0.3mm, Features="Moisture Resistant", Height=0.01inch, Lead Free="Lead Free", Length=0.6mm, Military Standard=Not, Number of Terminations=2, Packaging="Tape and Reel", Part Number=RC0201FR-075K1L, Power=50mW, Power Rating=50mW, Termination=SMD/SMT, Width=0.3mm
R4 R8 R9 R10 R11 R12: library part R0185-A.13, "RES CHIP 0201 499R 1/20W 1%", Case Code (Imperial)=0201, Case Code (Metric)=0603, Manufacturer=Vishay, Max Operating Temperature=155°C, Max Power Dissipation=50mW, Min Operating Temperature=-55°C, Package Quantity=1, Resistance=499R, Resistor Type="Thick Film", Temperature Coefficient=100ppm/°C, Tolerance=1%, Voltage Rating=30V, Case/Package=0201, Code Arduino=R0185, Contact Plating=Tin, Depth=0.3mm, Height=0.23mm, Lead Free="Lead Free", Length=0.6mm, Mount="Surface Mount", Number of Terminations=2, Packaging="Tape and Reel", Part Number=CRCW0201499RFKED, Power=50mW, Power Rating=50mW, Radiation Hardening=No, Termination=SMD/SMT, Voltage Rating (DC)=30V, Weight=6E-06oz, Width=0.012inch
R7: library part R0058-A.15, "RES CHIP 0402 1M 1% 1/16W", Case Code (Imperial)=0402, Case Code (Metric)=1005, Manufacturer=Vishay, Manufacturer 2=Panasonic, Manufacturer Part Number 2=ERJ-2RKF1004X, Power=63mW, Tolerance=1%, Case/Package=0402, Code Arduino=0139, Package=0402, Part Number=CRCW04021M00FKED
R14 R15 R16 R17 R19 R20: library part R0140-A.13, "RES CHIP 0201 0R 1/20W 5%", Case Code (Imperial)=0201, Case Code (Metric)=0603, Manufacturer=Vishay, Power=50mW, Tolerance=5%, Case/Package=0201, Code Arduino=R0140, Length=0.6mm, Part Number=CRCW02010000Z0ED
R21: library part R0199-A.11, "RES CHIP 0201 220k 1% 1/20W", Case Code (Imperial)=0201, Case Code (Metric)=0603, Manufacturer=Yageo, Power=50mW, Tolerance=1%, Case/Package=0201, Code Arduino=R0199, Part Number=AC0201FR-07220KL
SJ1: library part UT0006-A.12, "Solder Jumper shorted pads. This is not a component"
U2: library part U0072-A.6, "IC STEP DOWN CONV 1A 22V QFN8", Manufacturer="Monolithic Power Systems", Code Arduino=U0072, Device Type="STEP DOWN CONV", Part Number=MP2322GQH, Pin Count=8
U3: library part U0297-A.2, "IC FLASH 128MB 6DFN 3V", Case/Package=HVSON, Manufacturer="Giga Devices", Max Operating Temperature=85°C, Max Supply Voltage=3.6V, Min Operating Temperature=-40°C, Min Supply Voltage=3V, Code Arduino=U0297, Part Number=GD25B128EWIGR, Pin Count=8
Y1: library part X0003-A.5, "CRYSTAL 32.768kHz 20ppm 12.5pF SMD 1.6x0.9mm", Frequency=32.768kHz, Frequency Stability=0.12%, Frequency Tolerance=20ppm, Load Capacitance=12.5pF, Manufacturer="Citizen FineDevice", Max Operating Temperature=85°C, Min Operating Temperature=-40°C, Series Resistance=70kR, Code Arduino=0213, Part Number=CM315D32768DZFT, Radiation Hardening=No

## Free pads (board coordinates)
  round 1.651 hole 1.651 unplated: MH(1.27,1.27) MH(1.27,16.51) MH(41.91,1.27) MH(41.91,16.51)

## Via types
v1: diameter 0.4, hole 0.2, TOP to BOTTOM, tented both sides, 129 vias

## Nets (pads, with @x,y where several pads share a name; then routed paths per layer and width w, separated by ;. In a path a pad name is that pad's centre, name@x,y a point inside that pad or via, vN(x,y) a via of type N, cw(c..) or ccw(c..) an arc to the next point about the centre after c; other vN are vias at no path point)
+3V3: 3V3.X C2.2 C9.2 C21.2 C27.2 DL1.1 JP1.2 L2.1 M1.A8 R1.2 R2.2 R3.2 R8.2 R9.2 R22.2 SJ1.2 U3.8 | length 44.8
  TOP w0.127: R2.2@9.904,13.69 R22.2@10.524,13.69 R1.2@11.144,13.69 11.74,13.69 11.752,13.678 11.765,13.665 R3.2@11.775,13.655 ; R3.2@11.75,13.65 R3.2@11.787,13.687
  TOP w0.15: R9.2@3.566,3.29 4.16,3.29 v1(4.2,3.25) ; DL1.1@11.189,12.195 11.574,12.195 11.775,12.396 v1(11.775,13.201) R3.2@11.775,13.655
  TOP w0.2: R8.2@3.565,14.49 5.69,14.49 6.1,14.9 7.317,14.9 7.558,14.658 v1(7.558,14.036) ; v1(26.586,9.754) 26.586,9.79 26.76,9.964 L2.1@26.76,10.314 ; C2.2@27.32,13.364 27.635,13.048 C9.2@27.635,12.214 27.779,12.357 28.615,12.357 28.996,12.739 v1(29.032,12.739) 29.032,12.701 M1.A8@29.543,12.19
  TOP w0.3: C21.2@14.035,14.4 14.669,14.4 15.191,13.878 ; v1(37.566,8.909) 37.582,8.892 37.582,8.109 37.934,7.757 39.078,7.757 39.332,8.012 v1(39.359,8.012)
  TOP w0.5: C27.2@14.648,8.748 14.648,8.698 14.833,8.513 14.964,8.513 v1(15.392,8.085) ; C27.2@14.648,8.848 14.648,9.392 15,9.744 15,13.687 15.293,13.98 U3.8@16.084,13.98
  SIG w0.2: v1(26.586,9.754) 26.607,9.734 27.36,9.734
  SIG w0.4: v1(4.2,3.25) 4.2,3.248 5.242,2.206
  SIG w0.5: 6.36,2.397 6.36,1.28 JP1.2@6.35,1.27 6.627,1.27 7.457,2.1
  BOTTOM w0.3: v1(29.032,12.739) 29.059,12.739 30.098,11.699 33.358,11.699 34.578,10.48 35.048,10.48 35.328,10.2 35.328,10.188 35.809,9.706 36.612,9.706 37.11,9.207 37.268,9.207 v1(37.566,8.909) ; 3V3.X@39.263,6.341 39.154,6.45 39.154,7.779 39.359,7.984 v1(39.359,8.012)
  BOTTOM w0.5: v1@15.407,8.1 16.875,8.1 17.17,7.805 SJ1.2@17.17,6.82
CC1_1: J1.A5 R6.2 | length 6.3
  TOP w0.127: v1(6.055,6.369) 6.065,6.38 7.077,6.38 R6.2@7.087,6.39
  TOP w0.2: v1(4.476,10.099) 4.52,10.099 4.71,10.29 J1.A5@5.276,10.29
  SIG w0.127: v1(4.476,10.099) 4.476,8.939 5.262,8.153 5.262,7.163 v1(6.055,6.369)
CC2_1: J1.B5 R5.2 | length 2.2
  TOP w0.127: J1.B5@5.276,7.89 5.779,7.89 6.623,7.045 R5.2@7.083,7.045
GND: C1.1 C2.1 C4.2 C5.2 C9.1 C12.1 C16.1 C21.1 C22.2 C23.1 C24.1 C26.1 C27.1 C28.1 DL3.C GND1.X GND2.X J1.A1 J1.A12 J1.B1 J1.B12 JP1.14 JP2.4 M1.A1 M1.A9 M1.B2 M1.B8 M1.E4 M1.E5 M1.F4 M1.F5 M1.K2 M1.K3 M1.K5 M1.K7 M1.K8 M1.L1 M1.L9 M1.M1 M1.M2 M1.M8 M1.M9 PB1.1 Q1.S R5.1 R6.1 R7.1 R13.1 R21.1 U2.1 U3.4 U3.9 | length 63.4
  TOP w0.127: v1(25.907,11.448) 26.191,11.164 C1.1@27.06,11.164 ; C9.1@26.121,12.199 C9.1@26.135,12.214 ; v1(26.236,9.329) 26.928,9.329 26.967,9.368 26.995,9.368 27.085,9.458 C4.2@27.085,9.464 ; v1(26.523,4.376) 26.536,4.389 26.536,4.789 26.61,4.864 C5.2@27.085,4.864 ; M1.A9@29.543,13.29 v1(30.03,12.802) M1.B8@30.643,12.19 ; v1(30.085,5.014) 30.085,5.033 M1.B2@30.643,5.59 ; v1(33.356,9.669) 33.713,9.669 M1.E5@33.943,9.44 ; v1(33.417,8.667) 33.491,8.667 33.581,8.577 33.706,8.577 M1.E4@33.943,8.34 ; v1(34.851,10.003) 34.851,9.674 M1.F5@35.151,9.374 ; v1(34.968,7.587) 34.968,8.265 M1.F4@35.043,8.34 ; M1.K2@39.443,5.59 39.755,5.278 39.893,5.278 v1(39.946,5.226) ; M1.K3@39.443,6.69 39.443,7.181 39.641,7.379 v1(39.641,7.401) ; M1.K5@39.443,8.89 39.578,9.026 v1(39.578,9.712) ; M1.K7@39.443,11.09 v1(39.93,10.602) ; M1.M8@42.443,12.19 M1.M9@42.443,13.29
  TOP w0.15: DL3.C@0.675,14.73 1.101,14.73 1.749,15.377 2.3,15.377 v1(2.449,15.526) ; Q1.S@6.862,4.69 6.911,4.738 6.911,5.225 7.087,5.402 R13.1@7.087,5.69 ; v1(7.727,9.829) v1@7.748,9.85 ; C22.2@8.741,4.758 v1(8.741,5.391) ; v1(12.568,14.429) 12.582,14.414 13.151,14.414 C21.1@13.165,14.4 ; 12.743,6.243 12.731,6.256 v1(12.731,6.652) 12.779,6.7 12.779,6.869 13.148,7.239 C26.1@13.148,7.368 ; C28.1@13.05,3.797 v1(13.5,3.797) R21.1@13.95,3.797 ; v1(19.266,8.616) 19.87,8.616 U3.4@19.894,8.64 ; C12.1@41.735,3 42.245,3 42.428,2.817 v1(42.451,2.817)
  TOP w0.2: J1.B12@5.276,11.915 5.893,11.915 6.025,12.047 v1(6.025,12.525) J1.A1@5.276,12.525 ; v1(6.333,14.373) 6.337,14.369 6.939,14.369 R7.1@6.943,14.365 ; 25.411,14.87 32.393,14.87 v1(33.391,13.872) ; v1(25.907,11.448) 26.121,11.663 C9.1@26.121,12.199 ; C9.1@26.135,12.214 26.135,13.049 C2.1@26.45,13.364 ; M1.A1@29.543,4.49 30.066,5.014 v1(30.085,5.014) ; M1.K7@39.443,11.09 M1.K8@39.443,12.19
  TOP w0.25: J1.A12@5.276,5.255 6.233,5.255 ; J1.B1@5.276,5.865 v1@6.229,5.865 ; v1@6.233,5.861 6.233,5.255 ; Q1.S@6.862,4.77 6.377,5.255 6.233,5.255 ; v1(9.94,4.743) C23.1@9.94,5.442 ; v1(11.32,4.743) C24.1@11.32,5.442 ; C26.1@13.148,7.368 13.148,7.438 12.553,8.033 12.553,8.093 13.148,8.689 C27.1@13.148,8.748
  TOP w0.3: U3.9@17.989,11.31 v1(20.29,11.31) ; M1.L9@40.828,13.176 M1.L9@40.943,13.29 v1(41.693,13.29) M1.M9@42.443,13.29 ; M1.L1@40.91,4.457 M1.L1@40.943,4.49 v1(41.693,4.49) M1.M1@42.443,4.49 M1.M2@42.443,5.59
  BOTTOM w0.2: GND1.X@1.778,6.731 1.931,6.731 2.3,7.1 4.709,7.1 5.936,5.872 6.222,5.872 v1(6.233,5.861) ; GND2.X@39.263,11.421 39.263,11.343 39.93,10.676 v1(39.93,10.602)
  BOTTOM w0.3: v1(6.025,12.525) 6.044,12.506 6.294,12.506 6.579,12.221 8.179,12.221 9.571,10.829 9.571,8.89 9.047,8.365 7.744,8.365 v1(7.727,8.382)
  other v1: 7.62,1.27 8.535,6.997 12.553,8.053 12.3,11.3 24.472,11.822 35.594,15.806
GPIO0_1: JP1.13 M1.F7 R12.1 R22.1 | length 49.4
  TOP w0.127: R12.1@8.664,14.39 8.664,14.734 8.694,14.734 9.006,15.046 9.335,15.046 9.633,15.345 10.874,15.345 10.929,15.29 15.533,15.29 15.801,15.557 16.89,15.557 17.225,15.893 17.792,15.893 18.484,15.202 20.123,15.202 20.552,14.773 v1(20.552,14.226) ; R22.1@10.524,14.24 v1@10.524,14.696 ; v1(34.555,11.578) M1.F7@35.043,11.09
  SIG w0.127: v1(8.66,14.7) 9.051,14.31 10.134,14.31 v1(10.522,14.698) ; JP1.13@34.275,1.27 35.506,2.501 38.434,2.501 39.555,3.622 39.555,5.064 ; v1(36.1,10.457) 36.448,10.109 37.577,10.109 38.969,8.718 38.969,7.446 39.555,6.86 39.555,5.064
  BOTTOM w0.127: v1(20.552,14.226) 20.788,13.989 32.143,13.989 v1(34.555,11.578) 34.98,11.578 v1(36.1,10.457)
GPIO1_1: JP1.4 M1.E8 | length 39.4
  TOP w0.127: M1.E8@33.943,12.19 33.387,11.635 33.387,10.473 33.596,10.265 33.987,10.265 34.433,9.819 v1@34.433,7.961
  SIG w0.127: v1(33.005,1.87) 33.528,1.87 35.987,4.329 35.987,5.164 36.507,5.684 36.874,5.684 37.103,5.913 37.103,7.096 37.156,7.148 37.156,7.517 37.081,7.591 37.02,7.591 36.521,8.09 34.755,8.09 v1(34.474,7.809)
  BOTTOM w0.127: JP1.4@11.415,1.27 12.636,2.491 20.229,2.491 21.449,3.711 22.526,3.711 23.271,2.966 28.116,2.966 28.12,2.962 29.075,2.962 29.078,2.966 30.576,2.966 30.756,2.786 31.98,2.786 32.306,2.459 32.416,2.459 v1(33.005,1.87)